# Altium PCB PCB.PcbDoc (part 1 of 2)
Units mm, origin at the board's own origin, x right, y up, seen from the top; angles counter-clockwise.
Board outline 53.34 x 28.45 mm, 2 copper layers (Top Layer, Bottom Layer), stack 1.671 mm thick; 30 components, 49 nets, 162 pads, 72 vias.
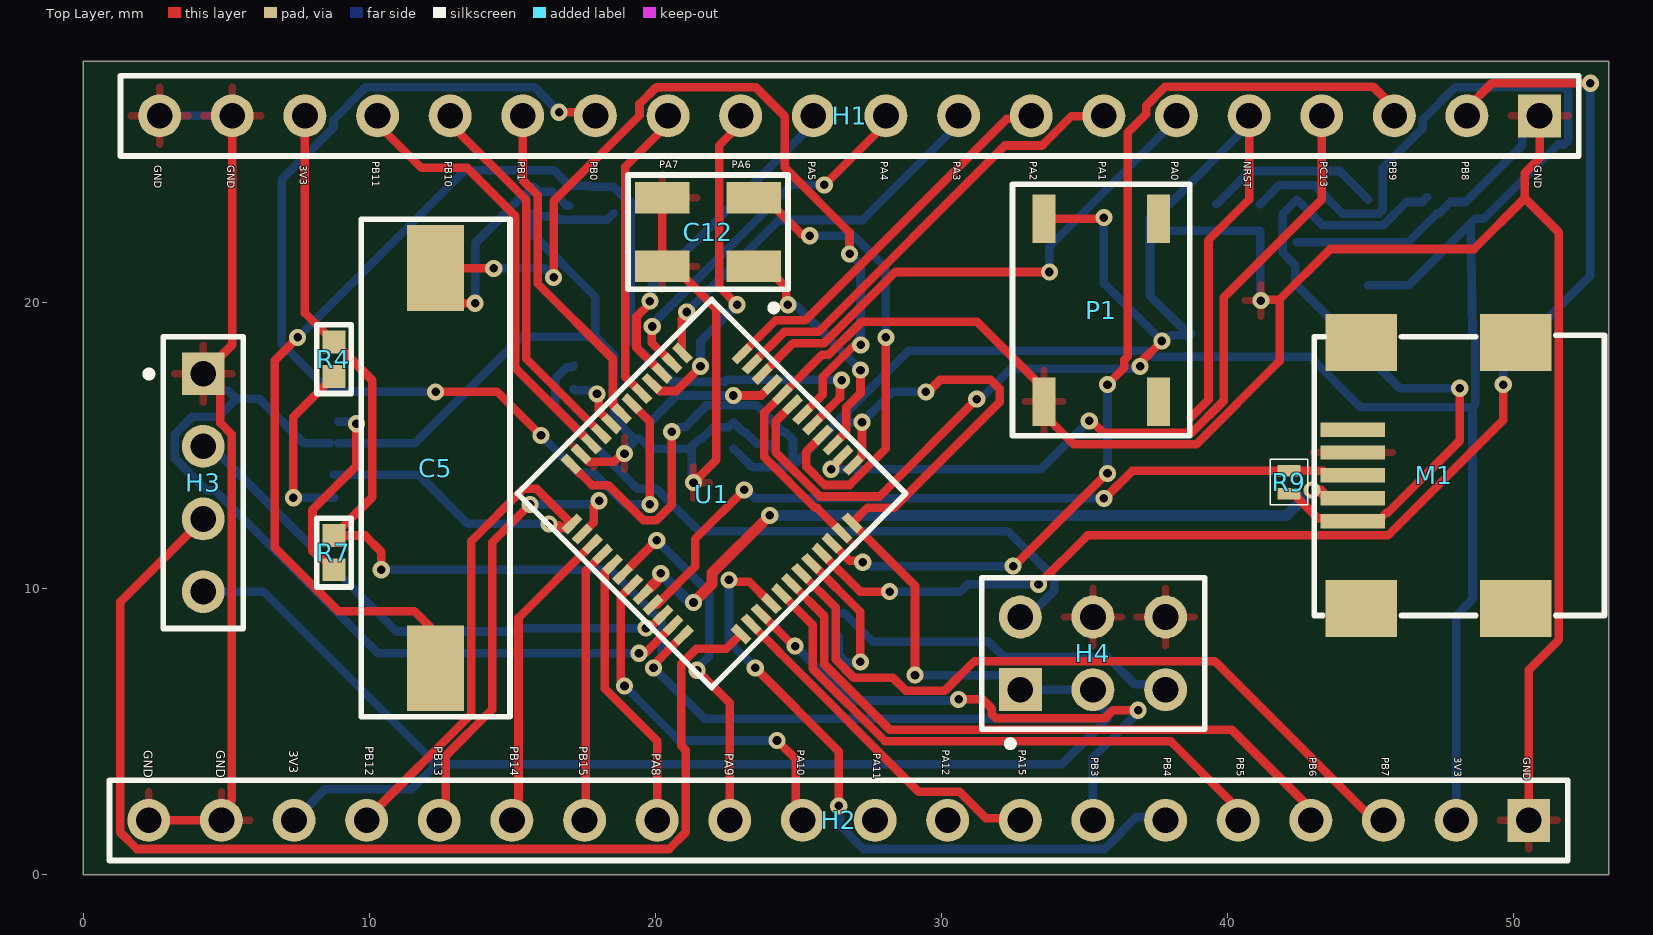
[diagram p0: Top Layer view]
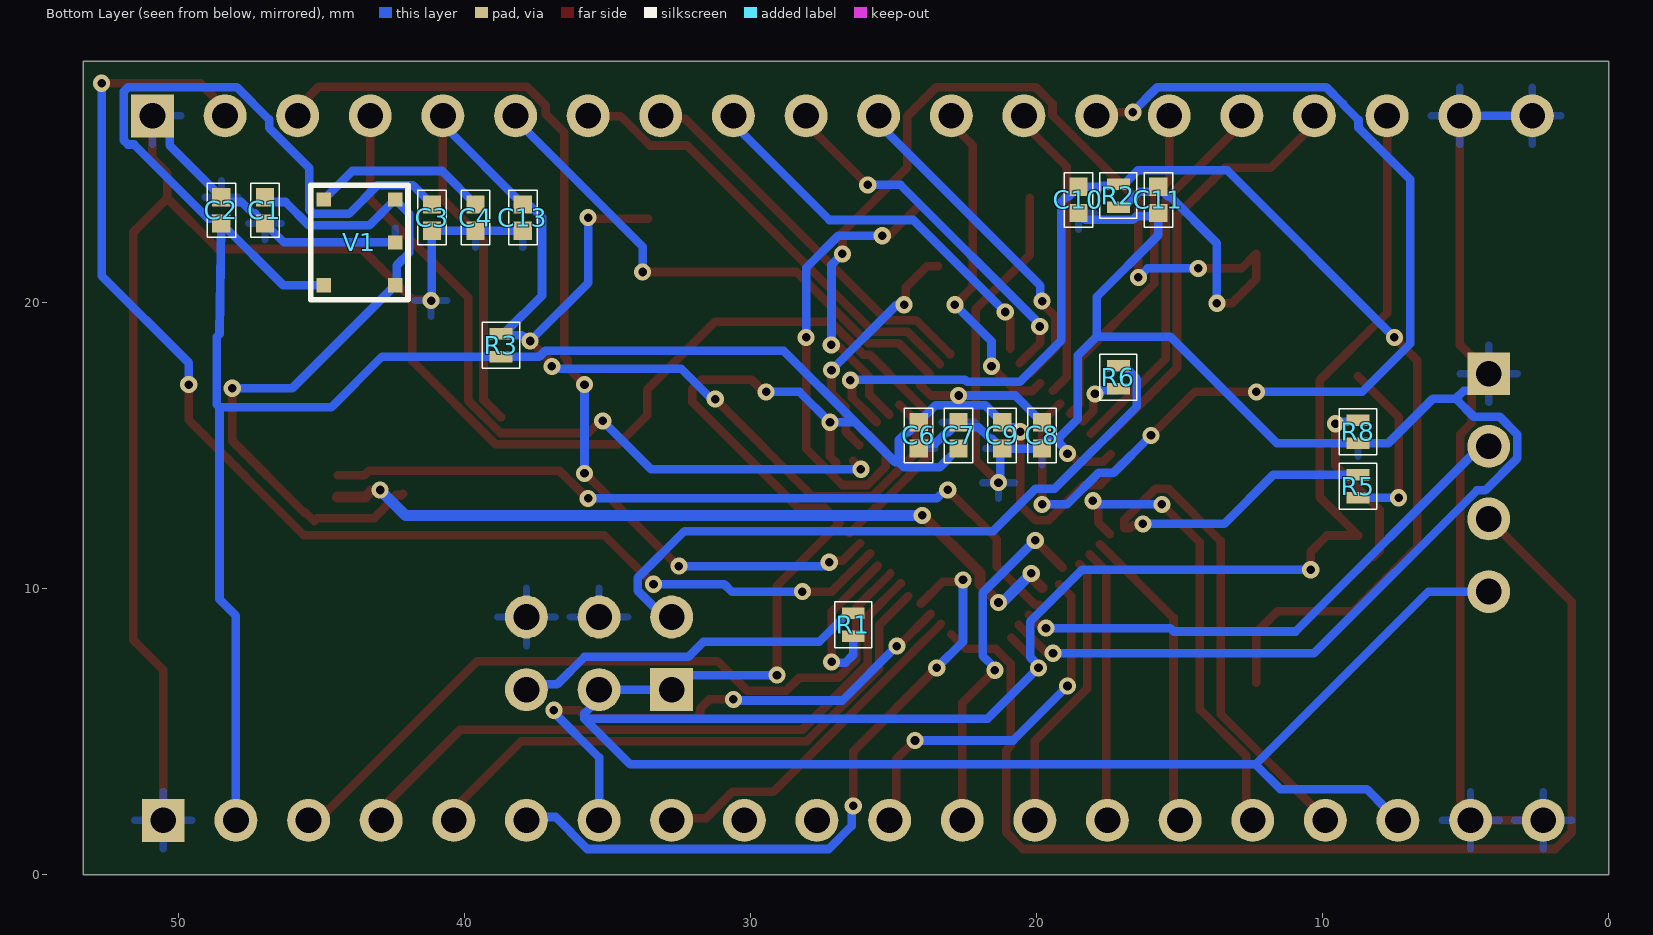
[diagram p1: Bottom Layer view, seen from below]
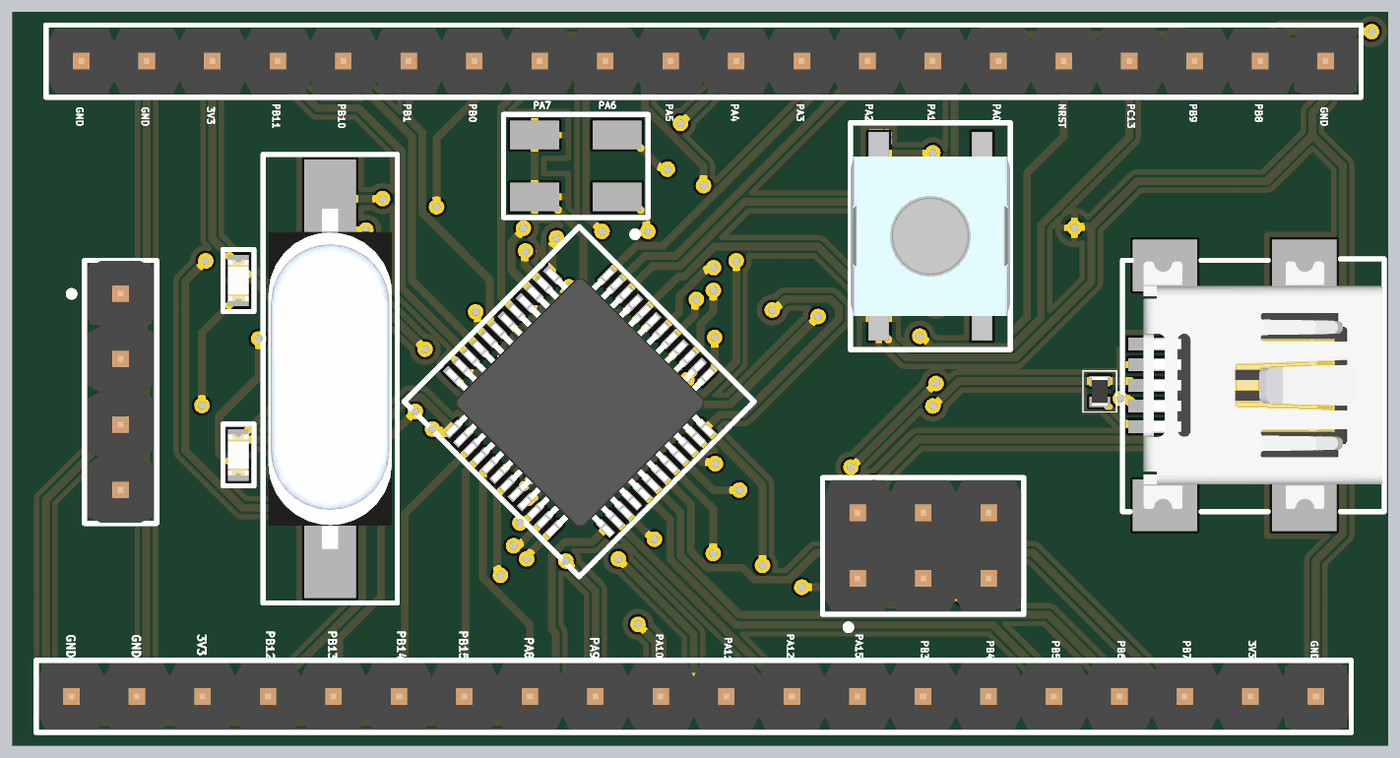
[diagram p2: 3D render of the assembled board from above, using the file's embedded part models]
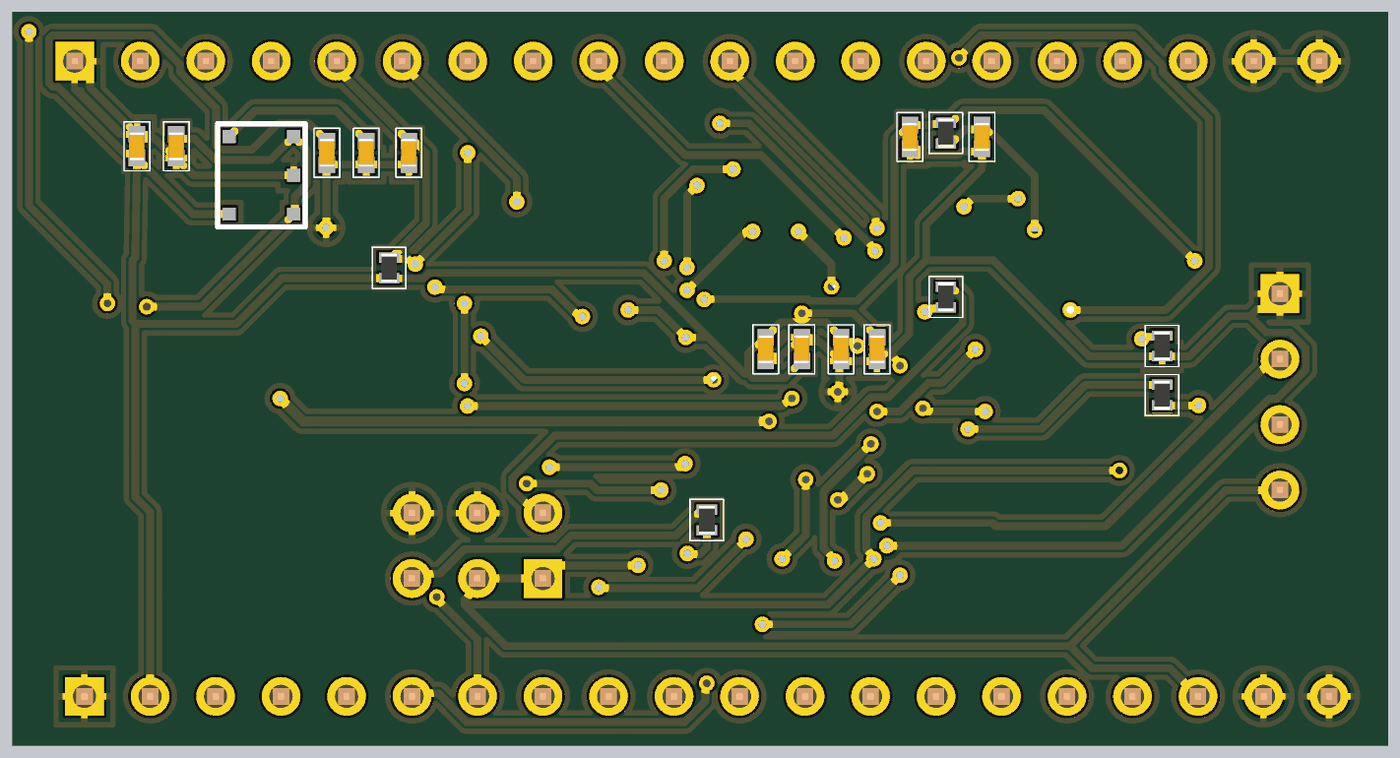
[diagram p3: 3D render of the assembled board from below, using the file's embedded part models]

## Layer stack, top to bottom
Top Solder: solder mask 0.0102, Solder Resist, Dk 3.5
Top Layer: signal copper 0.0356
Dielectric 1: dielectric 1.6, FR-4, Dk 4.8
Bottom Layer: signal copper 0.0356
Bottom Solder: solder mask 0.0102, Solder Resist, Dk 3.5

## Board outline
0,0 53.34,0 53.34,28.448 0,28.448

## Design rules (kind name [scope] priority, off if disabled: settings)
Clearance [All] p1: gap=0.1 ignorepadtopadclearanceinfootprint=TRUE
DiffPairsRouting [All] p1: maxlimit=0.254 minlimit=0.254 mostfreqgap=0.254 toplayer_minwidth=0.381 toplayer_maxwidth=0.381 toplayer_prefwidth=0.381 bottomlayer_minwidth=0.381 bottomlayer_maxwidth=0.381 bottomlayer_prefwidth=0.381 maxuncoupledlength=12.7
HoleSize [All] p1: absolutevalues=TRUE maxlimit=2.54 minlimit=0 maxpercent=80.000 minpercent=20.000
HoleToHoleClearance [All] p1: gap=0 allowstackedmicrovias=TRUE
MinimumSolderMaskSliver [All] p1: minsoldermaskwidth=0
PolygonConnect [All] p1: connectstyle=Relief reliefconductorwidth=0.254 reliefentries=4 polygonreliefangle="90 Angle" airgapwidth=0.254
RoutingVias [All] p1: holewidth=0.3 width=0.6 viastyle="Through Hole" minholewidth=0.3 minwidth=0.6 maxholewidth=0.3 maxwidth=0.6
SilkToSilkClearance [All] p1: silktosilkclearance=0
SilkToSolderMaskClearance [IsPad] p1: minsilkscreentomaskgap=0 clearancetoexposedcopper=TRUE
SolderMaskExpansion [All] p1: expansion=0.102 istentingtop=FALSE
Width [All] p1: maxlimit=1 minlimit=0.3 preferedwidth=0.3
24 further rules are at their usual default settings.

## Classes and differential pairs
differential pair class diff_90: D
differential pair D: +D_P -D_N

## Components (designator, comment, footprint, x,y, rotation, side; value= is the part's Value field where it differs from the comment)
C1 "0.1µF" CAPACITOR 46.99,23.241 r90 bottom
C2 "0.1µF" CAPACITOR 48.514,23.241 r270 bottom
C3 "1uF" CAPACITOR 41.148,22.987 r90 bottom
C4 "22pF" CAPACITOR 39.624,22.987 r90 bottom
C5 "8MHz" "CRYSTAL 8MHZ" 12.319,14.224 r90 top
C6 "0.1µF" CAPACITOR 24.13,15.367 r90 bottom
C7 "0.1µF" CAPACITOR 22.733,15.367 r270 bottom
C8 "0.1µF" CAPACITOR 19.812,15.367 r90 bottom
C9 "0.1µF" CAPACITOR 21.209,15.367 r90 bottom
C10 "22pF" CAPACITOR 18.542,23.604 r90 bottom
C11 "22pF" CAPACITOR 15.748,23.604 r90 bottom
C12 "32.768KHz" "CRYSTAL 32KHZ" 21.844,22.479 r90 top
C13 "0.1µF" CAPACITOR 37.973,22.987 r90 bottom
H1 "20x1 Header" "20 PIN HEADER" 26.797,26.543 r270 top
H2 "20x1 Header" "20 PIN HEADER" 26.416,1.905 r270 top
H3 "4x1 Header" "4 PIN HEADER" 4.191,13.716 r0 top
H4 "6x1 Header" "6 PIN HEADER" 35.306,7.747 r90 top
M1 "Mini USB" "MINI USB" 47.244,13.97 r180 top
P1 "Push Button" "PUSH BUTTON" 35.595,19.752 r90 top
R1 "10K Ohms" RESISTOR 26.416,8.744 r90 bottom
R2 "10M Ohms" RESISTOR 17.145,23.754 r270 bottom
R3 "10K Ohms" RESISTOR 38.735,18.523 r270 bottom
R4 "Red LED" LED 8.763,18.034 r90 top
R5 "1K Ohm" RESISTOR 8.763,13.589 r270 bottom
R6 "10K Ohms" RESISTOR 17.145,17.399 r270 bottom
R7 "Red LED" LED 8.763,11.268 r90 top
R8 "1K Ohm" RESISTOR 8.763,15.494 r90 bottom
R9 "10K Ohms" RESISTOR 42.164,13.735 r270 top
U1 "STM32F103C8T6" "MICRO CONTROLLER" 21.971,13.335 r225 top
V1 "Voltage Regulator" "VOLTAGE REGULATOR" 43.688,22.116 r90 bottom

## Footprints (in the part's own frame and the unit in brackets; to place one, negate y for a bottom-side part, rotate by r counter-clockwise, add the part's x,y. Pads: shape width x height; smd on the part's side, far side on the other; paste and mask are expansions set on the pad)
"4 PIN HEADER" [mm]
  rect 1.5x1.5 hole 0.9: 1(0,3.81)
  round 1.5 hole 0.9: 2(0,1.27) 3(0,-1.27) 4(0,-3.81)
  silkscreen extent -2,-5.1 1.4,5.1, body extent -1.27,-5.08 1.27,5.08, height 5.55
"6 PIN HEADER" [mm]
  rect 1.5x1.5 hole 0.9: 1(-1.27,2.54)
  round 1.5 hole 0.9: 2(-1.27,0) 3(-1.27,-2.54) 4(1.27,2.54) 5(1.27,0) 6(1.27,-2.54)
  silkscreen extent -3.26,-3.91 2.64,3.89, body extent -2.53,-3.82 2.55,3.8, height 5.55
"20 PIN HEADER" [mm]
  rect 1.5x1.5 hole 0.9: 1(0,24.13)
  round 1.5 hole 0.9: 2(0,21.59) 3(0,19.05) 4(0,16.51) 5(0,13.97) 6(0,11.43) 7(0,8.89) 8(0,6.35) 9(0,3.81) 10(0,1.27) 11(0,-1.27) 12(0,-3.81) 13(0,-6.35) 14(0,-8.89) 15(0,-11.43) 16(0,-13.97) 17(0,-16.51) 18(0,-19.05) 19(0,-21.59) 20(0,-24.13)
  silkscreen extent -1.4,-25.5 1.4,25.5, body extent -1.27,-25.4 1.27,25.4, height 5.55
CAPACITOR [mm]
  rect 0.64x0.64 smd: 1(-0.46,0) 2(0.46,0)
  silkscreen extent -0.95,-0.5 0.95,0.5, body extent -0.55,-0.3 0.55,0.3, height 0.88
"CRYSTAL 8MHZ" [mm]
  rect 3x2 smd: 1(-7,0) 2(7,0)
  silkscreen extent -8.7,-2.6 8.7,2.6, body extent -6.6,-2.4 6.6,2.4, height 4.31
"CRYSTAL 32KHZ" [mm]
  rect 1.1x1.9 smd: 1(-1.2,-1.6) 2(1.2,-1.6) 3(1.2,1.6) 4(-1.2,1.6)
  silkscreen extent -2.75,-2.8 2,2.8, body extent -2,-2.8 2,2.8, height 0.9
LED [mm]
  rect 0.8x0.8 smd: 1(-0.6,0) 2(0.6,0)
  silkscreen extent -1.2,-0.6 1.2,0.6, body extent -0.8,-0.4 0.8,0.4, height 0.54
"MICRO CONTROLLER" [mm] "CQFP, 48-Leads, Body 33.75x33.75mm, Pitch 0.64mm, IPC Medium Density"
  rect 0.75x0.3 smd: 1(-4.2,2.8) 2(-4.2,2.3) 3(-4.2,1.8) 4(-4.2,1.3) 5(-4.2,0.8) 6(-4.2,0.3) 7(-4.2,-0.2) 8(-4.2,-0.7) 9(-4.2,-1.2) 10(-4.2,-1.7) 11(-4.2,-2.2) 12(-4.2,-2.7) 25(4.2,-2.7) 26(4.2,-2.2) 27(4.2,-1.7) 28(4.2,-1.2) 29(4.2,-0.7) 30(4.2,-0.2) 31(4.2,0.3) 32(4.2,0.8) 33(4.2,1.3) 34(4.2,1.8) 35(4.2,2.3) 36(4.2,2.8)
  rect 0.3x0.75 smd: 13(-2.75,-4.2) 14(-2.25,-4.2) 15(-1.75,-4.2) 16(-1.25,-4.2) 17(-0.75,-4.2) 18(-0.25,-4.2) 19(0.25,-4.2) 20(0.75,-4.2) 21(1.25,-4.2) 22(1.75,-4.2) 23(2.25,-4.2) 24(2.75,-4.2) 37(2.75,4.2) 38(2.25,4.2) 39(1.75,4.2) 40(1.25,4.2) 41(0.75,4.2) 42(0.25,4.2) 43(-0.25,4.2) 44(-0.75,4.2) 45(-1.25,4.2) 46(-1.75,4.2) 47(-2.25,4.2) 48(-2.75,4.2)
  silkscreen extent -4.8,-4.8 4.8,4.8, body extent -4.5,-4.45 4.5,4.55, height 1.46
"MINI USB" [mm]
  rect 2.25x0.5 smd: 1(2.85,1.6) 2(2.85,0.8) 3(2.85,0) 4(2.85,-0.8) 5(2.85,-1.6)
  rect 2.5x2 smd: 6(2.55,4.65) 7(2.55,-4.65) 8(-2.85,-4.65) 9(-2.85,4.65)
  silkscreen extent -5.95,-4.9 4.2,4.9, body extent -5.87,-4.8 3.38,4.8, height 3.91
"PUSH BUTTON" [mm]
  rect 1.7x0.8 smd: 1(-3.2,2) 2(3.2,2) 3(-3.2,-2) 4(3.2,-2)
  silkscreen extent -4.4,-3.1 4.4,3.1, body extent -4,-3.1 4,3.1, height 3.1
RESISTOR [mm]
  rect 0.4x0.8 smd: 1(-0.4,0) 2(0.4,0)
  silkscreen extent -0.8,-0.65 0.8,0.65, body extent -0.55,-0.3 0.55,0.3, height 0.55
"VOLTAGE REGULATOR" [mm]
  rect 0.5x0.5 smd: 1(-1.5,-1.25) 2(0,-1.25) 3(1.5,-1.25) 4(1.5,1.25) 5(-1.5,1.25)
  silkscreen extent -2,-1.7 2,1.7, body extent -1.9,-1.6 1.9,1.6, height 0.81

## Part data
C1 C2 C6 C7 C8 C9 C13: library part C0805C104J5RACTU, "KEMET - C0805C104J5RACTU - SMD Multilayer Ceramic Capacitor, 0.1 µF, 50 V, 0805 [2012 Metric], ± 5%, X7R, C Series KEMET", Capacitance=100nF, Case/Package=0805, Case Code (Metric)=2012, Dielectric=X7R, Dielectric Material=Ceramic, Manufacturer=KEMET, Max Operating Temperature=125°C, Min Operating Temperature=-55°C, Package Quantity=1, Supplier Part Number 1=399-1171-1-ND, Tolerance=5%, Voltage=50V, Case Code (Imperial)=0805, ComponentLink1Description=https://datasheet.ciiva.com/7842/1732721-7842179.pdf?src-supplier=Element14, ComponentLink1URL=https://datasheet.ciiva.com/7842/1732721-7842179.pdf?src-supplier=Element14, ComponentLink2Description=https://datasheet.ciiva.com/14589/70095383-14589015.pdf?src-supplier=Allied+Electronics, ComponentLink2URL=https://datasheet.ciiva.com/14589/70095383-14589015.pdf?src-supplier=Allied+Electronics, ComponentLink3Description=https://datasheet.ciiva.com/5417/kem-c1002-x7r-smd-5417352.pdf?src-supplier=Mouser, ComponentLink3URL=https://datasheet.ciiva.com/5417/kem-c1002-x7r-smd-5417352.pdf?src-supplier=Mouser, ComponentLink4Description=https://datasheet.ciiva.com/39122/docfinderpartnumberc0402c102k5ractu-39122924.pdf?src-supplier=Onlinecomponents.com, ComponentLink4URL=https://datasheet.ciiva.com/39122/docfinderpartnumberc0402c102k5ractu-39122924.pdf?src-supplier=Onlinecomponents.com, ComponentLink5Description=https://datasheet.ciiva.com/7258/1828800-7258413.pdf?src-supplier=Newark, ComponentLink5URL=https://datasheet.ciiva.com/7258/1828800-7258413.pdf?src-supplier=Newark, ComponentLink6Description=https://datasheet.ciiva.com/28682/1851736-28682223.pdf?src-supplier=Element14, ComponentLink6URL=https://datasheet.ciiva.com/28682/1851736-28682223.pdf?src-supplier=Element14, Contact Plating=Tin,Matte, Depth=1.25mm, Height=0.9mm, Lead Pitch=0.75mm, Length=2mm, Manufacturer Part Number=C0805C104J5RACTU, Mount="Surface Mount,PCB", Number of Pins=2, Packaging="Tape and Reel", Pricing 1="1=0.19000, 10=0.13100, 100=0.06630, 500=0.04538, 1000=0.04015 (USD)", Radiation Hardening=No, REACH SVHC="No SVHC", RoHS=Yes, Stock 1=675679, Supplier 1=Digi-Key, Termination=SMD/SMT, Thickness=0.035inch, Voltage Rating=50V, Voltage Rating (DC)=50V, Width=0.049inch
C3: library part GCM21BR71H105KA03K, "Cap Ceramic 1uF 50V X7R 10% Pad SMD 0805 125C Automotive T/R", Case/Package=0805, Case Code (Metric)=2012, Dielectric=X7R, Manufacturer=Murata, Max Operating Temperature=125°C, Min Operating Temperature=-55°C, Package Quantity=10000, Ratings=AEC-Q200, Supplier Part Number 1=490-13310-1-ND, Tolerance=10%, Voltage Rating=50V, Capacitance=1uF, Case Code (Imperial)=0805, ComponentLink1Description=http://www.mouser.com/ds/2/281/c03e-806517.pdf?src-supplier=Mouser, ComponentLink1URL=http://www.mouser.com/ds/2/281/c03e-806517.pdf?src-supplier=Mouser, ComponentLink2Description=https://www.murata.com/~/media/webrenewal/support/library/catalog/products/capacitor/mlcc/c03e.ashx?la=en-us&src-supplier=Digi-Key, ComponentLink2URL=https://www.murata.com/~/media/webrenewal/support/library/catalog/products/capacitor/mlcc/c03e.ashx?la=en-us&src-supplier=Digi-Key, Height=1.25mm, Length=0.079inch, Manufacturer Part Number=GCM21BR71H105KA03K, Mount="Surface Mount", Packaging="Tape and Reel", Pricing 1="1=0.31000, 10=0.21600, 100=0.12970, 500=0.09726, 1000=0.08213, 2500=0.07781, 5000=0.07349 (USD)", RoHS=Yes, Stock 1=44921, Supplier 1=Digi-Key, Termination=SMD/SMT, Thickness=0.055inch, Voltage Rating (DC)=50V, Weight=0.000335oz, Width=1.25mm
C4 C10 C11: library part C0805C220J5GACTU, "Capacitor: ceramic; MLCC; 22pF; 50VDC; C0G; ±5%; SMD; 0805", Case/Package=0805, Case Code (Metric)=2012, Dielectric=C0G, Dielectric Material=Ceramic, Manufacturer=KEMET, Max Operating Temperature=125°C, Min Operating Temperature=-55°C, Package Quantity=1, Supplier Part Number 1=399-1113-1-ND, Temperature Coefficient=30ppm/°C, Tolerance=5%, Voltage=50V, Capacitance=22pF, Case Code (Imperial)=0805, ComponentLink1Description=https://datasheet.ciiva.com/7842/kem-c1003-c0g-smd-7842569.pdf?src-supplier=Element14, ComponentLink1URL=https://datasheet.ciiva.com/7842/kem-c1003-c0g-smd-7842569.pdf?src-supplier=Element14, ComponentLink2Description=https://datasheet.ciiva.com/28668/1789732-28668761.pdf?src-supplier=Element14, ComponentLink2URL=https://datasheet.ciiva.com/28668/1789732-28668761.pdf?src-supplier=Element14, ComponentLink3Description=https://datasheet.ciiva.com/7842/1372242-7842570.pdf?src-supplier=Element14, ComponentLink3URL=https://datasheet.ciiva.com/7842/1372242-7842570.pdf?src-supplier=Element14, Contact Material=Tin, Contact Plating=Tin,Matte, Depth=1.25mm, Height=0.78mm, Lead Free="Lead Free", Length=2mm, Manufacturer Part Number=C0805C220J5GACTU, Mount="PCB,Surface Mount", Packaging="Tape and Reel", Pricing 1="1=0.10000, 10=0.07000, 100=0.03100, 500=0.02214, 1000=0.01739 (USD)", Radiation Hardening=No, REACH SVHC="No SVHC", RoHS=Yes, Stock 1=658795, Supplier 1=Digi-Key, Termination=SMD/SMT, Thickness=0.035inch, Voltage Rating=50V, Voltage Rating (DC)=50V, Weight=0.000194oz, Width=1.25mm
C5: library part ECS-80-20-5PX-TR, "CRYSTAL 8.000 MHZ 20PF SMD", ESR (Equivalent Series Resistance)=60R, Frequency Stability=50ppm, Frequency Tolerance=30ppm, Load Capacitance=20pF, Manufacturer="ECS International", Max Operating Temperature=70°C, Min Operating Temperature=-10°C, Supplier Part Number 1=XC2076CT-ND, ComponentLink1Description=http://www.ecsxtal.com/store/pdf/partnumber4.pdf?src-supplier=Digi-Key, ComponentLink1URL=http://www.ecsxtal.com/store/pdf/partnumber4.pdf?src-supplier=Digi-Key, ComponentLink2Description=http://www.ecsxtal.com/store/pdf/csm-7x.pdf?src-supplier=Digi-Key, ComponentLink2URL=http://www.ecsxtal.com/store/pdf/csm-7x.pdf?src-supplier=Digi-Key, Frequency=8MHz, Height=0.169inch, Lead Free="Lead Free", Length=0.449inch, Manufacturer Part Number=ECS-80-20-5PX-TR, Mount="Surface Mount", Packaging="Tape and Reel", Pricing 1="1=0.30000, 10=0.24800, 50=0.22280, 100=0.19800, 500=0.18810 (USD)", RoHS=Yes, Stock 1=2393, Supplier 1=Digi-Key, Width=0.189inch
C12: library part ECS-.327-12.5-34B-C-TR, "Crystals 32.768KHz 12.5pF", Case/Package=SMD/SMT, ESR (Equivalent Series Resistance)=70kR, Frequency=32.768kHz, Frequency Stability=10ppm, Load Capacitance=12.5pF, Manufacturer="ECS International", Max Operating Temperature=85°C, Min Operating Temperature=-40°C, Package Quantity=3000, Supplier Part Number 1=XC1968CT-ND, ComponentLink1Description=http://www.mouser.com/ds/2/122/ecx-31b-1108368.pdf?src-supplier=Mouser, ComponentLink1URL=http://www.mouser.com/ds/2/122/ecx-31b-1108368.pdf?src-supplier=Mouser, ComponentLink2Description=http://www.ecsxtal.com/store/pdf/partnumber4.pdf?src-supplier=Digi-Key, ComponentLink2URL=http://www.ecsxtal.com/store/pdf/partnumber4.pdf?src-supplier=Digi-Key, Frequency Tolerance=10ppm, Height=0.035inch, Lead Free="Lead Free", Lead Pitch=2.4mm, Length=0.126inch, Manufacturer Part Number=ECS-.327-12.5-34B-C-TR, Mount="Surface Mount", Number of Pins=2, Packaging="Tape and Reel", Pricing 1="1=0.74000, 10=0.65800, 50=0.61500, 100=0.54340, 500=0.51480, 1000=0.42900 (USD)", RoHS=Yes, Stock 1=21159, Supplier 1=Digi-Key, Termination=SMD/SMT, Width=0.061inch
H1 H2: library part 61304011121, "CONN HEADER VERT 40POS 2.54MM", Color=Black, Manufacturer="Wurth Electronics", Supplier Part Number 1=732-5307-ND, ComponentLink1Description=http://www.farnell.com/cad/1737268.pdf?src-supplier=Element14, ComponentLink1URL=http://www.farnell.com/cad/1737268.pdf?src-supplier=Element14, ComponentLink2Description=https://katalog.we-online.de/em/datasheet/6130xx11121.pdf?src-supplier=Digi-Key, ComponentLink2URL=https://katalog.we-online.de/em/datasheet/6130xx11121.pdf?src-supplier=Digi-Key, Connector Type="Male Pin", Contact Material=Copper, Contact Mating Length=0.236inch, Contact Plating=Gold, Gender=Male, Manufacturer Part Number=61304011121, Mount="Through Hole", Number of Contacts=40, Number of Positions=40, Number of Rows=1, Packaging=Bulk, Pitch=0.1inch, REACH SVHC=Unknown, RoHS=Yes, Supplier 1=Digi-Key, Termination=Solder
H3: library part 22-23-2041, "Conn Wire to Board HDR 4 POS 2.54mm Solder ST Thru-Hole KK® Bag", Color=White, Contact Resistance=10mR, Current Rating=4A, Flammability Rating="UL94 V-0", Housing Color=Orange, Insulation Resistance=500GR, Manufacturer=Molex, Max Current Rating=7A, Max Operating Temperature=75°C, Max Voltage Rating (AC)=600V, Min Operating Temperature=-55°C, Package Quantity=2000, Supplier Part Number 1=WM4202-ND, Voltage Rating=250V, Approvals=UL,CSA, ComponentLink1Description=https://datasheet.ciiva.com/19462/1966245-19462162.pdf?src-supplier=Jameco, ComponentLink1URL=https://datasheet.ciiva.com/19462/1966245-19462162.pdf?src-supplier=Jameco, ComponentLink2Description=https://datasheet.ciiva.com/5151/0022232041-pcb-headers-227043-5151795.pdf?src-supplier=Mouser, ComponentLink2URL=https://datasheet.ciiva.com/5151/0022232041-pcb-headers-227043-5151795.pdf?src-supplier=Mouser, ComponentLink3Description=https://datasheet.ciiva.com/19454/232282-19454309.pdf?src-supplier=Jameco, ComponentLink3URL=https://datasheet.ciiva.com/19454/232282-19454309.pdf?src-supplier=Jameco, ComponentLink4Description=https://datasheet.ciiva.com/11747/0900766b80d8f4d1-11747883.pdf?src-supplier=RSComponents, ComponentLink4URL=https://datasheet.ciiva.com/11747/0900766b80d8f4d1-11747883.pdf?src-supplier=RSComponents, ComponentLink5Description=https://datasheet.ciiva.com/16725/0022232041-pcb-headers-16725643.pdf?src-supplier=Avnet+Europe, ComponentLink5URL=https://datasheet.ciiva.com/16725/0022232041-pcb-headers-16725643.pdf?src-supplier=Avnet+Europe, ComponentLink6Description=https://datasheet.ciiva.com/7106/1859840-7106278.pdf?src-supplier=Newark, ComponentLink6URL=https://datasheet.ciiva.com/7106/1859840-7106278.pdf?src-supplier=Newark, ComponentLink7Description=https://datasheet.ciiva.com/7843/1896518-7843901.pdf?src-supplier=Element14, ComponentLink7URL=https://datasheet.ciiva.com/7843/1896518-7843901.pdf?src-supplier=Element14, Contact Gender=Male, Contact Material="Brass,Copper Alloy,Tin", Contact Plating=Tin,Copper, Depth=9.02mm, Gender=Male, Glow Wire Compliant=Non-compliant, Halogen Free="Low Halogen", Height=18.42mm, Housing Material=Nylon, Lead Free="Lead Free", Length=19.81mm, Manufacturer Part Number=22-23-2041, Mount="Cable,Through Hole", Number of Circuits=4, Number of Contacts=4, Number of Lines=1, Number of Poles=4, Number of Positions=4, Number of Rows=1, Orientation=Straight, Packaging=Bulk, Pitch=2.54mm, Pricing 1="1=0.28000, 10=0.26700, 100=0.18720, 500=0.16044, 1000=0.13370, 5000=0.11460, 10000=0.10696 (USD)", Radiation Hardening=No, REACH SVHC=Unknown, RoHS=Yes, Stock 1=33520, Supplier 1=Digi-Key, Termination="Through Hole", Voltage Rating (DC)=250V
H4: library part 22-27-2061, "6 Way 2.54mm Kk Molex Straight Header", Color=Natural, Contact Resistance=10mR, Housing Color=White, Manufacturer=Molex, Max Operating Temperature=75°C, Min Operating Temperature=0°C, Supplier Part Number 1=WM4115-ND, ComponentLink1Description=https://datasheet.ciiva.com/716/022272051-sd-716503.pdf?src-supplier=Digi-Key, ComponentLink1URL=https://datasheet.ciiva.com/716/022272051-sd-716503.pdf?src-supplier=Digi-Key, ComponentLink2Description=https://datasheet.ciiva.com/11746/0900766b80462750-11746243.pdf?src-supplier=RSComponents, ComponentLink2URL=https://datasheet.ciiva.com/11746/0900766b80462750-11746243.pdf?src-supplier=RSComponents, ComponentLink3Description=https://datasheet.ciiva.com/15217/getdatasheetpartid-176662-15217687.pdf?src-supplier=Verical, ComponentLink3URL=https://datasheet.ciiva.com/15217/getdatasheetpartid-176662-15217687.pdf?src-supplier=Verical, ComponentLink4Description=https://datasheet.ciiva.com/16468/0022272061-pcb-headers-16468939.pdf?src-supplier=Avnet+Asia, ComponentLink4URL=https://datasheet.ciiva.com/16468/0022272061-pcb-headers-16468939.pdf?src-supplier=Avnet+Asia, ComponentLink5Description=https://datasheet.ciiva.com/20207/22-0838e-20207118.pdf?src-supplier=Rapid+Electronics, ComponentLink5URL=https://datasheet.ciiva.com/20207/22-0838e-20207118.pdf?src-supplier=Rapid+Electronics, Connector Type="Male Pin", Contact Material=Brass, Contact Mating Length=0.295inch, Contact Plating=Tin,Copper, Depth=5.8mm, Fastening Type=Friction, Gender=Male, Housing Material=Nylon, Length=15.24mm, Manufacturer Part Number=22-27-2061, Mount="Through Hole", Number of Contacts=6, Number of Positions=6, Number of Rows=1, Orientation=Straight, Packaging=Bulk, Pitch=2.54mm, Pricing 1="1=0.49000, 10=0.46000, 100=0.35240, 500=0.30640, 1000=0.25278, 5000=0.22214, 10000=0.20682 (USD)", RoHS=Yes, Stock 1=2007, Supplier 1=Digi-Key, Termination=Solder
M1: library part 0548191572, "Conn Mini USB Type B RCP 5 POS 0.8mm Solder RA SMD 5 Terminal 1 Port Embossed T/R", Manufacturer=Molex, Max Operating Temperature=85°C, Min Operating Temperature=-20°C, Package Quantity=4800, Supplier Part Number 1=WM6794CT-ND, ComponentLink1Description=https://datasheet.ciiva.com/3897/190710548191572-io-nectors-3897712.pdf?src-supplier=Arrow, ComponentLink1URL=https://datasheet.ciiva.com/3897/190710548191572-io-nectors-3897712.pdf?src-supplier=Arrow, Connector Type=USB, Contact Material="Copper Alloy", Contact Plating=Gold, Depth=9mm, Gender=Receptacle, Housing Material=Polyphthalamide, Length=9.9mm, Manufacturer Part Number=0548191572, Mount="Surface Mount,Horizontal", Number of Contacts=5, Number of Ports=1, Number of Terminals=5, Orientation="Right Angle", Packaging="Tape and Reel", Pitch=0.8mm, Pricing 1="1=2.51000, 10=2.27800, 25=2.13840, 50=2.04540, 100=1.95240, 250=1.76648, 500=1.62702, 1000=1.39458 (USD)", RoHS=Yes, Stock 1=2164, Supplier 1=Digi-Key, Termination=Solder
P1: library part G3B15AB-S-YA, "G3B Series SPDT On-Mom Upright Black Cap Surface Mount Pushbutton Switch", Flammability Rating="UL94 V-0", Manufacturer="NKK Switches", Max Current Rating=100mA, Max Operating Temperature=85°C, Max Voltage Rating (AC)=28V, Min Operating Temperature=-30°C, Package Quantity=50, Power Rating=400mW, Supplier Part Number 1=360-3894-ND, Actuator Material=Polyphenylene, Actuator Type="Round, Button", ComponentLink1Description=https://datasheet.ciiva.com/16467/g3pushbuttons-16467583.pdf?src-supplier=Future+Electronics, ComponentLink1URL=https://datasheet.ciiva.com/16467/g3pushbuttons-16467583.pdf?src-supplier=Future+Electronics, Contact Material=Bronze, Contact Plating=Gold, Depth=7.6mm, Electrical Life=50000Cycles, Housing Material=Polyphenylene, Lead Free="Lead Free", Length=11mm, Manufacturer Part Number=G3B15AB-S-YA, Max Voltage Rating (DC)=28V, Mechanical Life=50000Cycles, Mount="Surface Mount", Packaging=Rail/Tube, Pricing 1="1=6.90000, 10=6.20900, 25=5.89680, 50=5.64720, 100=5.46000, 250=5.17920, 500=4.74240, 1000=4.52400 (USD)", RoHS=Yes, Stock 1=32, Supplier 1=Digi-Key, Switch Function=On-Mom, Termination="Gull Wing", Throw Configuration=SPDT, Voltage Rating (AC)=28V, Voltage Rating (DC)=28V
R1 R3 R6 R9: library part PHT0603Y1002BGT, "RES SMD 10KOHM 0.1% 0.0375W 0603", Case/Package=0603, Case Code (Metric)=1608, Manufacturer="Vishay Sfernice", Max Operating Temperature=215°C, Min Operating Temperature=-55°C, Power Rating=12.5mW, Resistance=10kR, Supplier Part Number 1=PHTB-10KCT-ND, Temperature Coefficient=15ppm/°C, Tolerance=0.1%, Voltage Rating=75V, Case Code (Imperial)=0603, ComponentLink1Description=https://datasheet.ciiva.com/9052/pht-9052382.pdf?src-supplier=Avnet, ComponentLink1URL=https://datasheet.ciiva.com/9052/pht-9052382.pdf?src-supplier=Avnet, Composition="Thin Film", Height=0.5mm, Length=1.6mm, Manufacturer Part Number=PHT0603Y1002BGT, Number of Pins=2, Packaging="Tape and Reel", Pricing 1="1=11.30000, 10=10.59500, 100=7.53460 (USD)", Radiation Hardening=No, REACH SVHC="No SVHC", RoHS=Yes, Stock 1=173, Supplier 1=Digi-Key, Termination=SMD/SMT, Voltage Rating (DC)=75V, Width=0.8mm
R2: library part HVC0805T1005JET, "RES SMD 10M OHM 5% 1/8W 0805", Case/Package=0805, Case Code (Metric)=2012, Manufacturer=Ohmite, Max Operating Temperature=155°C, Max Power Dissipation=125mW, Min Operating Temperature=-55°C, Package Quantity=1, Resistance=10MR, Supplier Part Number 1=HVC0805T1005JETCT-ND, Temperature Coefficient=100ppm/°C, Tolerance=5%, Voltage Rating=200V, Case Code (Imperial)=0805, ComponentLink1Description=https://datasheet.ciiva.com/7763/hvc-7763831.pdf?src-supplier=Element14, ComponentLink1URL=https://datasheet.ciiva.com/7763/hvc-7763831.pdf?src-supplier=Element14, ComponentLink2Description=https://datasheet.ciiva.com/2517/res-hvc-2517979.pdf?src-supplier=Digi-Key, ComponentLink2URL=https://datasheet.ciiva.com/2517/res-hvc-2517979.pdf?src-supplier=Digi-Key, ComponentLink3Description=https://datasheet.ciiva.com/2517/res-hvc-2517980.pdf?src-supplier=Digi-Key, ComponentLink3URL=https://datasheet.ciiva.com/2517/res-hvc-2517980.pdf?src-supplier=Digi-Key, ComponentLink4Description=https://datasheet.ciiva.com/2517/res-hvc-2517981.pdf?src-supplier=Digi-Key, ComponentLink4URL=https://datasheet.ciiva.com/2517/res-hvc-2517981.pdf?src-supplier=Digi-Key, ComponentLink5Description=https://datasheet.ciiva.com/16770/70024806-16770190.pdf?src-supplier=Allied+Electronics, ComponentLink5URL=https://datasheet.ciiva.com/16770/70024806-16770190.pdf?src-supplier=Allied+Electronics, Composition="Thick Film", Depth=1.25mm, Height=0.022inch, Length=0.079inch, Manufacturer Part Number=HVC0805T1005JET, Number of Terminations=2, Packaging="Tape and Reel", Power Rating=125mW, Pricing 1="1=2.32000, 10=2.05700, 100=1.57080 (USD)", REACH SVHC=Unknown, RoHS=Yes, Stock 1=256, Supplier 1=Digi-Key, Termination=SMD/SMT, Voltage Rating (DC)=200V, Width=0.049inch
R4 R7: library part LHR974-LP-1, "LED RED DIFFUSED 0805 SMD", Forward Current=30mA, Forward Voltage=2.6V, Manufacturer="Osram Opto", Max Operating Temperature=85°C, Min Operating Temperature=-30°C, Reverse Voltage=5V, Supplier Part Number 1=SML-D12U1WT86CT-ND, Test Current=20mA, ComponentLink1Description=http://components.arrow.com/part/dataview/0323_01825492?src-supplier=Arrow+Europe, ComponentLink1URL=http://components.arrow.com/part/dataview/0323_01825492?src-supplier=Arrow+Europe, ComponentLink2Description=http://www.jameco.com/Jameco/Products/ProdDS/2085634.pdf?src-supplier=Jameco, ComponentLink2URL=http://www.jameco.com/Jameco/Products/ProdDS/2085634.pdf?src-supplier=Jameco, ComponentLink3Description=http://www.mouser.com/ds/2/311/LH%20R974%20-%20CHIPLED%200805-318659.pdf?src-supplier=Mouser, ComponentLink3URL=http://www.mouser.com/ds/2/311/LH%20R974%20-%20CHIPLED%200805-318659.pdf?src-supplier=Mouser, ComponentLink4Description=https://dammedia.osram.info/media/resource/hires/osram-dam-2493888/LH%20R974.pdf?src-supplier=Digi-Key, ComponentLink4URL=https://dammedia.osram.info/media/resource/hires/osram-dam-2493888/LH%20R974.pdf?src-supplier=Digi-Key, ComponentLink5Description=https://www.verical.com/server-webapp/html/getDatasheet?partID=258950&src-supplier=Verical, ComponentLink5URL=https://www.verical.com/server-webapp/html/getDatasheet?partID=258950&src-supplier=Verical, ComponentLink6Description=http://components.arrow.com/part/dataview/41971690S1077610N9133?src-supplier=Arrow, ComponentLink6URL=http://components.arrow.com/part/dataview/41971690S1077610N9133?src-supplier=Arrow, ComponentLink7Description=http://components.arrow.com/part/dataview/41971690S6190115N2128?src-supplier=Arrow, ComponentLink7URL=http://components.arrow.com/part/dataview/41971690S6190115N2128?src-supplier=Arrow, Depth=1.35mm, Dominant Wavelength=645nm, Length=2.1mm, Lens Style=Diffused,Colorless, Luminous Intensity=15mcd, Manufacturer Part Number=LHR974-LP-1, Mount="Surface Mount", Number of Elements=1, Number of Pins=2, Packaging="Tape and Reel", Radiation Hardening=No, RoHS=Yes, Supplier 1=Digi-Key, Viewing Angle=160°
R5 R8: library part CRGP2512F1K0, "TE CONNECTIVITY - CRGP2512F1K0 - SMD Chip Resistor, 2512 [6432 Metric], 1 kohm, CRGP Series, 500 V, Thick Film, 2 W", Case/Package=2512, Manufacturer="TE Connectivity", Max Operating Temperature=155°C, Max Power Dissipation=2W, Min Operating Temperature=-55°C, Resistance=1kR, Supplier Part Number 1=A130721CT-ND, Temperature Coefficient=100ppm/°C, Tolerance=1%, ComponentLink1Description=https://4donline.ihs.com/images/VipMasterIC/IC/TYEL/TYEL-S-A0005460475/TYEL-S-A0005460475-1.pdf?hkey=52A5661711E402568146F3353EA87419&src-supplier=Farnell, ComponentLink1URL=https://4donline.ihs.com/images/VipMasterIC/IC/TYEL/TYEL-S-A0005460475/TYEL-S-A0005460475-1.pdf?hkey=52A5661711E402568146F3353EA87419&src-supplier=Farnell, ComponentLink2Description=https://www.te.com/commerce/DocumentDelivery/DDEController?Action=srchrtrv&amp;DocNm=9-1773463-9&amp;DocType=DS&amp;DocLang=English&src-supplier=Digi-Key, ComponentLink2URL=https://www.te.com/commerce/DocumentDelivery/DDEController?Action=srchrtrv&amp;DocNm=9-1773463-9&amp;DocType=DS&amp;DocLang=English&src-supplier=Digi-Key, ComponentLink3Description=https://4donline.ihs.com/images/VipMasterIC/IC/TYEL/TYEL-S-A0005460475/TYEL-S-A0005460475-1.pdf?hkey=52A5661711E402568146F3353EA87419&src-supplier=Newark, ComponentLink3URL=https://4donline.ihs.com/images/VipMasterIC/IC/TYEL/TYEL-S-A0005460475/TYEL-S-A0005460475-1.pdf?hkey=52A5661711E402568146F3353EA87419&src-supplier=Newark, ComponentLink4Description=https://4donline.ihs.com/images/VipMasterIC/IC/TYEL/TYEL-S-A0005460475/TYEL-S-A0005460475-1.pdf?hkey=52A5661711E402568146F3353EA87419&src-supplier=Element14, ComponentLink4URL=https://4donline.ihs.com/images/VipMasterIC/IC/TYEL/TYEL-S-A0005460475/TYEL-S-A0005460475-1.pdf?hkey=52A5661711E402568146F3353EA87419&src-supplier=Element14, ComponentLink5Description=https://www.te.com/commerce/DocumentDelivery/DDEController?Action=srchrtrv&DocNm=9-1773463-9&DocType=DS&DocLang=English&src-supplier=Digi-Key, ComponentLink5URL=https://www.te.com/commerce/DocumentDelivery/DDEController?Action=srchrtrv&DocNm=9-1773463-9&DocType=DS&DocLang=English&src-supplier=Digi-Key, Composition="Thick Film", Manufacturer Part Number=CRGP2512F1K0, Number of Terminations=2, Packaging="Tape and Reel", Pricing 1="1=0.50000, 10=0.35500, 100=0.18470, 1000=0.09947 (USD)", RoHS=No, Stock 1=10481, Supplier 1=Digi-Key
U1: "STMICROELECTRONICS - STM32F103C8T6 - ARM MCU, Motor Control, STM32 Family STM32F1 Series Microcontrollers, ARM Cortex-M3, 32bit, 72 MHz", Case/Package=LQFP, Frequency=72MHz, Manufacturer=STMicroelectronics, Max Operating Temperature=85°C, Max Power Dissipation=363mW, Max Supply Voltage=3.6V, Min Operating Temperature=-40°C, Min Supply Voltage=2V, Package Quantity=250, Supplier Part Number 1=497-6063-ND, Address Bus Width=32b, ComponentLink1Description=https://datasheet.ciiva.com/15122/getdatasheetpartid-69880-15122076.pdf?src-supplier=Verical, ComponentLink1URL=https://datasheet.ciiva.com/15122/getdatasheetpartid-69880-15122076.pdf?src-supplier=Verical, ComponentLink2Description=https://datasheet.ciiva.com/26816/stm32f103c8t6-26816902.pdf?src-supplier=IIIC, ComponentLink2URL=https://datasheet.ciiva.com/26816/stm32f103c8t6-26816902.pdf?src-supplier=IIIC, ComponentLink3Description=https://datasheet.ciiva.com/16210/cd00161566-16210248.pdf?src-supplier=Future+Electronics, ComponentLink3URL=https://datasheet.ciiva.com/16210/cd00161566-16210248.pdf?src-supplier=Future+Electronics, ComponentLink4Description=https://datasheet.ciiva.com/14100/pustm-arm-microcont-stm32f103-en-14100508.pdf?src-supplier=Distrelec, ComponentLink4URL=https://datasheet.ciiva.com/14100/pustm-arm-microcont-stm32f103-en-14100508.pdf?src-supplier=Distrelec, ComponentLink5Description=https://datasheet.ciiva.com/8054/1730126-8054942.pdf?src-supplier=Element14, ComponentLink5URL=https://datasheet.ciiva.com/8054/1730126-8054942.pdf?src-supplier=Element14, ComponentLink6Description=https://datasheet.ciiva.com/48687/001075658-da-01-en-mcu-64kb-mem-stm32f103c8t6-lqfp-48-stm-48687589.pdf?src-supplier=Conrad, ComponentLink6URL=https://datasheet.ciiva.com/48687/001075658-da-01-en-mcu-64kb-mem-stm32f103c8t6-lqfp-48-stm-48687589.pdf?src-supplier=Conrad, Core Architecture=ARM, Data Bus Width=32b, Density=64KB, Height=1.45mm, Interface=I2C,SPI,USB,CAN,IrDA,UART,USART,LIN, Lead Free="Lead Free", Length=7mm, Manufacturer Part Number=STM32F103C8T6, Max Frequency=72MHz, Memory Size=64KB, Memory Type=FLASH, Number of ADC Channels=10, Number of Bits=32, Number of I2C Channels=2, Number of I/Os=37, Number of Pins=48, Number of Programmable I/O=48, Number of PWM Channels=1, Number of SPI Channels=2, Number of Timers/Counters=4, Oscillator Type=Internal, Packaging=Tray, Peripherals="POR,PWM,WDT,DMA,Temp Sensor,I2C", Pricing 1="1=4.94000, 10=4.43700, 25=4.19480, 100=3.63540, 250=3.44896, 500=3.09474, 1000=2.61002, 2500=2.47952, 5000=2.38630 (USD)", Radiation Hardening=No, RAM Size=20KB, REACH SVHC="No SVHC", RoHS=Yes, Stock 1=1173, Supplier 1=Digi-Key, Termination=SMD/SMT, Watchdog Timer=Yes, Width=7.2mm
V1: library part RT9193-33GB, "IC REG LINEAR 3.3V 300MA SOT23-5", Case/Package=SOT-23-5, Dropout Voltage=220mV, Manufacturer=Richtek, Max Input Voltage=5.5V, Max Operating Temperature=125°C, Min Current Limit=360mA, Min Input Voltage=2.5V, Min Operating Temperature=-40°C, Nominal Output Voltage=3.3V, Output Current=300mA, Supplier Part Number 1=1028-1014-1-ND, ComponentLink1Description=https://datasheet.ciiva.com/28652/1782157-28652989.pdf?src-supplier=Element14, ComponentLink1URL=https://datasheet.ciiva.com/28652/1782157-28652989.pdf?src-supplier=Element14, ComponentLink2Description=https://datasheet.ciiva.com/2046/3d3futf-83fb3frfm5mtkzlte2lnbkzg3d3d3f3d-2046896.pdf?src-supplier=Digi-Key, ComponentLink2URL=https://datasheet.ciiva.com/2046/3d3futf-83fb3frfm5mtkzlte2lnbkzg3d3d3f3d-2046896.pdf?src-supplier=Digi-Key, Lead Free="Lead Free", Manufacturer Part Number=RT9193-33GB, Mount="Surface Mount", Number of Pins=5, Number of Regulators=1, Output Voltage=3.3V, Packaging="Tape and Reel", Pricing 1="1=0.50000, 10=0.43100, 25=0.40240, 100=0.29900, 250=0.25300, 500=0.24150, 1000=0.17825 (USD)", REACH SVHC=Unknown, RoHS=Yes, Stock 1=11176, Supplier 1=Digi-Key

## Via types
v1: diameter 0.6, hole 0.3, Top Layer to Bottom Layer, 72 vias

## Nets (pads, with @x,y where several pads share a name; then routed paths per layer and width w, separated by ;. In a path a pad name is that pad's centre, name@x,y a point inside that pad or via, vN(x,y) a via of type N, cw(c..) or ccw(c..) an arc to the next point about the centre after c; other vN are vias at no path point)
+3V3: C2.2 C3.2 C6.2 C7.2 C8.2 C9.2 H1.18 H2.2 H2.18 H3.4 H4.1 H4.2 R3.2 R4.2 R7.2 U1.1 U1.9 U1.24 U1.36 U1.48 V1.5 | length 212
  Top Layer w0.3: H1.18 7.747,19.65 10.1,17.297 10.1,13.205 R7.2 9.849,11.868 10.414,11.303 v1(10.414,10.668) ; U1.24 17.786,13.631 18.357,13.631 19.584,12.404 20.04,12.404 20.574,12.938 v1(20.574,15.494) ; v1(19.939,7.239) 19.939,7.343 U1.36@20.893,8.297 ; v1(22.733,16.764) 23.703,16.764 U1.9 ; U1.1@27.009,14.413 27.229,14.633 v1(27.229,15.827) ; v1(29.083,6.985) 29.083,10.112 27.044,12.151 U1.48 27.408,12.833 28.342,12.833 32.046,16.536 32.046,16.992 31.724,17.314 29.968,17.314 29.545,16.891 v1(29.464,16.891)
  Bottom Layer w0.3: H3.4 6.299,9.906 12.344,3.861 ; H2.18@7.366,2.312 7.381,2.297 7.758,2.297 8.459,2.998 11.481,2.998 12.344,3.861 ; v1(10.414,10.668) 18.415,10.668 20.225,8.858 20.225,7.607 19.939,7.32 v1(19.939,7.239) 21.717,5.461 35.814,5.461 ; C8.2@19.812,15.748 C8.2 20.749,16.764 v1(22.733,16.764) 22.733,16.421 ; v1(20.574,15.494) 20.655,15.494 20.818,15.657 21.039,15.657 C9.2 21.803,16.421 22.733,16.421 ; C7.2 23.389,14.251 24.64,14.251 24.816,14.427 ; v1(29.083,6.985) 32.166,6.985 32.486,6.665 32.486,6.477 H4.2 35.306,6.152 35.814,5.644 35.814,5.461 ; v1(29.464,16.891) 28.293,16.891 v1(27.229,15.827) 26.35,15.827 ; C3.2 41.817,24.116 43.054,24.116 44.054,23.116 45.292,23.116 45.438,23.262 45.438,24.72 46.847,26.129 46.847,26.417 47.973,27.543 51.781,27.543 51.927,27.397 51.927,25.689 51.781,25.543 51.571,25.543 48.979,22.951 48.684,22.951 C2.2 ; V1.5 46.349,20.616 C2.2 ; H2.2@48.006,2.032 48.006,9.065 48.58,9.638 48.58,16.346 ; 12.344,3.861 34.214,3.861 35.814,5.461 ; 22.733,16.421 23.536,16.421 C6.2 24.48,15.477 24.554,15.477 24.816,15.215 24.816,14.427 ; 24.816,14.427 24.95,14.427 26.35,15.827 ; 26.35,15.827 28.853,18.33 37.185,18.33 37.396,18.119 38.731,18.119 R3.2 42.894,18.123 44.671,16.346 48.58,16.346 ; C2.2 48.58,18.913 48.683,18.809 48.683,16.449 48.58,16.346
+5V: C1.2 M1.1 R9.2 V1.1 V1.3 | length 25.3
  Top Layer w0.3: R9.2 42.214,13.285 42.414,13.285 42.414,13.232 43.176,12.47 45.174,12.47 45.272,12.373 45.569,12.67 45.623,12.67 48.133,15.18 v1(48.133,17.018)
  Bottom Layer w0.3: C1.2 46.82,23.531 46.272,23.531 45.457,22.716 43.338,22.716 V1.3 41.938,23.116 41.938,21.762 42.384,21.316 42.384,20.67 46.036,17.018 v1(48.133,17.018)
BOOT0: H4.3 R1.2 | length 11.8
  Bottom Layer w0.3: R1.2 26.616,9.144 27.613,8.147 31.662,8.147 32.189,7.62 35.814,7.62 36.771,6.663 H4.3@37.159,6.663
BOOT1: H4.4 R6.1 | length 23.4
  Bottom Layer w0.3: R6.1 17.095,17.749 16.895,17.749 16.495,17.349 16.495,16.382 19.373,13.504 20.04,13.504 21.521,12.023 32.316,12.023 33.951,10.388 33.951,9.932 33.147,9.128 H4.4@33.147,9.017
D_N: M1.2 U1.32 | length 27
  Top Layer w0.381: U1.32@19.812,10.04 20.04,10.268 ; v1(21.336,9.525) 21.989,10.178 21.989,10.559 v1(24.003,12.573) ; v1(42.964,13.459) 43.006,13.417 43.272,13.417 43.481,13.208 M1.2@44.45,13.208
  Bottom Layer w0.381: v1(20.193,10.541) 21.167,9.567 21.294,9.567 v1(21.336,9.525) ; v1(24.003,12.573) 42.078,12.573 v1(42.964,13.459)
D_P: M1.3 R9.1 U1.33 | length 27.4
  Top Layer w0.3: U1.33 20.058,9.446 21.394,10.782 21.394,11.742 v1(23.114,13.462) ; v1(35.691,13.167) 35.719,13.167 36.687,14.135 42.694,14.135 42.698,14.139 43.154,14.139 43.158,14.135 43.354,14.135 43.519,13.97 M1.3@44.45,13.97
  Bottom Layer w0.3: v1(23.114,13.462) 23.195,13.462 23.49,13.167 v1(35.691,13.167)
GND: C1.1 C2.1 C3.1 C4.1 C6.1 C7.1 C8.1 C9.1 C10.1 C11.1 C12.3 C12.4 C13.1 H1.1 H1.19 H1.20 H2.1 H2.19 H2.20 H3.1 H4.5 H4.6 M1.4 P1.1 R8.1 U1.8 U1.23 U1.35 U1.47 V1.2 | length 186.5
  Top Layer w0.3: H2.20 H2.19 ; H3.1 5.207,18.542 H1.19@5.207,26.556 ; H3.1@4.331,17.526 4.791,17.066 4.791,15.8 5.191,15.4 5.191,2.595 4.826,2.23 H2.19@4.826,2.032 ; U1.23 17.678,14.446 18.556,14.446 18.842,14.732 v1(18.923,14.732) ; v1(19.431,7.747) 19.636,7.747 U1.35 ; C12.3 20.244,21.679 22.131,19.792 22.131,14.511 v1(21.336,13.716) ; U1.47 25.655,12.833 25.591,12.833 23.816,14.607 23.816,16.17 U1.8 25.835,18.189 26.063,18.189 27.22,19.346 31.251,19.346 33.615,16.982 33.615,16.082 34.645,15.052 38.916,15.052 41.834,17.969 41.834,20.117 ; v1(41.181,20.083) 41.215,20.117 41.834,20.117 ; H2.1 50.546,7.168 51.594,8.216 51.594,22.472 50.406,23.66 ; H1.1 50.927,25.062 50.406,24.541 50.406,23.66 ; 41.834,20.117 43.605,21.888 48.635,21.888 50.406,23.66
  Bottom Layer w0.3: H1.20 H1.19 ; H3.1 4.791,16.926 5.071,16.926 5.347,16.65 6.152,16.65 7.708,15.094 R8.1@8.613,15.094 ; 5.334,16.637 4.716,16.019 3.809,16.019 3.191,15.4 3.191,14.572 4.317,13.446 4.605,13.446 10.304,7.747 v1(19.431,7.747) ; R8.1@8.913,15.094 11.596,15.094 15.324,18.821 17.907,18.821 ; C10.1 18.302,22.904 16.641,22.904 16.518,23.027 15.865,23.027 C11.1 15.748,22.368 17.907,20.209 17.907,18.821 ; v1(18.923,14.732) 18.923,14.813 19.221,15.111 19.221,15.284 ; C9.1 C8.1 19.462,15.257 19.247,15.257 19.221,15.284 ; v1(21.336,13.716) 21.279,13.773 21.279,14.977 21.559,15.257 21.633,15.257 22.033,15.657 22.563,15.657 C7.1 23.083,15.477 23.157,15.477 23.557,15.077 23.96,15.077 C6.1 ; C13.1 C3.1 41.165,22.51 41.165,20.1 v1(41.181,20.083) ; V1.2 46.325,22.116 47.34,23.131 47.414,23.131 47.814,23.531 48.344,23.531 50.327,25.514 50.327,25.943 H1.1 ; 17.907,18.821 18.564,18.165 18.564,15.94 19.221,15.284
NetC4_2: C4.2 V1.4 | length 6.2
  Bottom Layer w0.3: C4.2 40.793,24.616 43.938,24.616 V1.4
NetR1_1: R1.1 U1.44 | length 5.6
  Top Layer w0.3: U1.44@25.56,10.807 27.172,9.194 v1(27.172,7.445)
  Bottom Layer w0.3: R1.1 26.416,7.694 26.687,7.423 27.15,7.423 v1(27.172,7.445)
NetR4_1: R4.1 R5.2 | length 6.2
  Top Layer w0.3: v1(7.346,13.189) 7.346,16.017 R4.1
  Bottom Layer w0.3: v1(7.346,13.189) R5.2
NetR6_2: R6.2 U1.20 | length 2
  Top Layer w0.3: v1(17.962,16.82) 18.02,16.762 18.02,16.226 U1.20@18.382,15.863
  Bottom Layer w0.3: R6.2 17.195,16.949 17.752,16.949 17.881,16.82 v1(17.962,16.82)
NetR7_1: R7.1 R8.2 | length 6.8
  Top Layer w0.3: R7.1 8.313,11.118 8.218,11.118 8.013,11.323 8.013,12.766 9.55,14.303 v1(9.55,15.773)
  Bottom Layer w0.3: R8.2@8.913,15.844 9.453,15.844 9.523,15.773 v1(9.55,15.773)
NRST: C13.2 H1.5 P1.2 R3.1 U1.7 | length 47.8
  Top Layer w0.3: U1.7 24.216,15.863 24.216,14.773 25.756,13.233 27.838,13.233 v1(31.242,16.637) ; P1.2 35.652,22.952 v1(35.687,22.987) ; v1(36.957,17.78) 36.957,17.907 v1(37.719,18.669) ; 38.735,16.002 39.347,16.614 39.347,22.197 40.767,23.617 H1.5
  Bottom Layer w0.3: v1(31.242,16.637) 31.369,16.637 32.427,17.695 36.872,17.695 v1(36.957,17.78) ; v1(35.687,22.987) 35.687,20.701 v1(37.719,18.669) 37.8,18.669 38.004,18.873 38.685,18.873 R3.1 ; R3.1@38.585,18.973 37.303,20.255 37.303,22.992 37.688,23.377 37.903,23.377 40.767,26.241 H1.5
PA0: H1.6 U1.10 | length 18.8
  Top Layer w0.3: U1.10 24.821,18.589 25.897,18.589 28.39,21.082 v1(33.782,21.082)
  Bottom Layer w0.3: v1(33.782,21.082) 33.782,21.971 38.227,26.416 H1.6
PA1: H1.7 U1.11 | length 15.9
  Top Layer w0.3: U1.11 24.514,18.989 25.704,18.989 32.223,25.508 33.509,25.508 33.544,25.543 33.561,25.543 34.553,26.535 35.679,26.535 H1.7
PA2: H1.8 U1.12 | length 13.6
  Top Layer w0.3: U1.12 24.207,19.389 25.247,19.389 32.295,26.437 33.041,26.437 H1.8
PA3: H1.9 U1.13 | length 13.9
  Top Layer w0.3: U1.13@20.928,18.408 20.928,19.434 21.098,19.604 v1(21.098,19.685)
  Bottom Layer w0.3: v1(21.098,19.685) 24.315,22.902 27.246,22.902 30.607,26.263 H1.9
PA4: H1.10 U1.14 | length 13
  Top Layer w0.3: v1(19.894,19.177) 19.894,19.144 19.869,19.12 19.869,18.619 U1.14 ; v1(25.908,24.13) 25.921,24.13 28.067,26.276 H1.10
  Bottom Layer w0.3: v1(19.894,19.177) 19.894,19.259 24.765,24.13 v1(25.908,24.13)
PA5: H1.11 U1.15 | length 11.9
  Top Layer w0.3: v1(19.812,20.066) 19.812,19.985 19.344,19.517 19.344,18.437 U1.15
  Bottom Layer w0.3: v1(19.812,20.066) 19.869,20.123 19.869,20.605 25.527,26.263 H1.11
PA6: H1.12 U1.16 | length 12
  Top Layer w0.3: U1.16 20.153,16.921 20.731,16.921 21.581,17.771 v1(21.581,17.789) ; v1(22.86,19.939) 22.244,20.555 22.244,25.52 22.987,26.263 H1.12
  Bottom Layer w0.3: v1(21.581,17.789) 21.581,18.66 v1(22.86,19.939)
PA7: H1.13 U1.17 | length 10.4
  Top Layer w0.3: U1.17@19.443,16.924 18.944,17.423 18.944,24.76 20.447,26.263 H1.13
PA8: H2.13 U1.29 | length 9.8
  Top Layer w0.3: U1.29 18.239,10.592 18.239,6.511 20.066,4.683 H2.13
PA9: H2.12 U1.30 | length 12.4
  Top Layer w0.3: U1.30@19.09,10.736 v1(20.052,11.698) ; v1(21.463,7.154) 22.606,6.011 H2.12@22.606,2.032
  Bottom Layer w0.3: v1(20.052,11.698) 21.886,9.864 21.886,7.658 21.463,7.235 v1(21.463,7.154)
PA10: H2.11 U1.31 | length 12.9
  Top Layer w0.3: v1(18.923,6.604) 18.923,6.685 18.796,6.812 18.796,9.736 U1.31 ; v1(24.257,4.699) 24.916,4.04 24.916,2.262 H2.11@25.146,2.032
  Bottom Layer w0.3: v1(18.923,6.604) 20.828,4.699 v1(24.257,4.699)
PA11: H2.10
PA12: H2.9
PA15: H2.8 U1.38 | length 12.3
  Top Layer w0.3: U1.38 24.342,7.782 24.342,7.773 29.21,2.905 30.64,2.905 31.566,1.979 32.713,1.979 H2.8@32.766,2.032
PB0: H1.14 U1.18 | length 37.6
  Top Layer w0.3: v1(12.319,16.891) 14.478,16.891 v1(16.002,15.367) ; v1(16.637,26.67) 17.78,26.67 H1.14 ; U1.18 19.812,15.848 v1(19.812,12.954)
  Bottom Layer w0.3: v1(12.319,16.891) 8.62,16.891 6.943,18.568 6.943,24.325 8.747,26.129 8.747,26.4 9.287,26.94 9.287,26.957 9.873,27.543 15.781,27.543 16.637,26.687 v1(16.637,26.67) ; v1(16.002,15.367) 17.307,14.062 17.831,14.062 18.939,12.954 v1(19.812,12.954)
PB1: H1.15 U1.19 | length 11.8
  Top Layer w0.3: H1.15 15.367,24.289 15.894,23.762 15.894,20.666 18.512,18.048 18.512,16.44 U1.19
PB3: H2.7 U1.39 | length 19.3
  Top Layer w0.3: U1.39 24.83,8.001 v1(24.892,8.001) ; v1(30.607,6.138) 31.442,6.138 31.766,5.814 31.766,5.623 31.912,5.477 35.72,5.477 36,5.757 v1(36.888,5.757)
  Bottom Layer w0.3: v1(24.892,8.001) 26.797,6.096 30.565,6.096 v1(30.607,6.138) ; H2.7@35.306,2.032 35.306,4.106 36.888,5.688 v1(36.888,5.757)
PB4: H2.6 U1.40 | length 24.2
  Top Layer w0.3: v1(22.579,10.314) 22.636,10.257 23.282,10.257 U1.40 ; v1(23.495,7.239) 26.416,4.318 v1(26.416,2.413)
  Bottom Layer w0.3: v1(22.579,10.314) 22.579,8.155 v1(23.495,7.239) ; v1(26.416,2.413) 26.473,2.356 26.473,1.703 27.272,0.905 35.72,0.905 36.306,1.491 36.306,1.508 36.822,2.024 H2.6@37.838,2.024
PB5: H2.5 U1.41 | length 20.1
  Top Layer w0.3: U1.41@24.499,9.746 25.508,8.737 25.508,7.2 28.031,4.677 38.021,4.677 40.156,2.542 40.156,2.262 H2.5@40.386,2.032
PB6: H2.4 U1.42 | length 22.7
  Top Layer w0.3: U1.42 25.908,9.044 25.908,7.366 28.197,5.077 40.161,5.077 42.696,2.542 42.696,2.262 H2.4@42.926,2.032
PB7: H2.3 U1.43 | length 25.8
  Top Layer w0.3: U1.43 26.308,9.352 26.308,7.532 26.944,6.895 28.305,6.895 28.765,6.435 30.126,6.435 31.168,7.477 39.569,7.477 45.014,2.032 H2.3@45.466,2.032
PB8: H1.2 U1.45 | length 44.9
  Top Layer w0.3: U1.45 27.168,9.906 v1(28.194,9.906) ; v1(33.401,10.16) 35.111,11.87 45.623,11.87 49.657,15.904 v1(49.657,17.145) ; H1.2 48.387,26.823 49.25,27.686 v1(52.705,27.686)
  Bottom Layer w0.3: v1(28.194,9.906) 30.67,9.906 30.924,10.16 v1(33.401,10.16) ; v1(49.657,17.145) 49.657,17.907 52.705,20.955 v1(52.705,27.686)
PB9: H1.3 U1.46 | length 34.3
  Top Layer w0.3: U1.46 26.793,10.988 27.199,10.988 v1(27.257,10.931) ; v1(32.512,10.795) 32.54,10.795 35.786,14.04 v1(35.814,14.04) ; v1(35.814,17.145) 36.407,17.738 36.407,18.008 36.523,18.124 36.523,25.965 37.168,26.61 37.168,26.898 37.829,27.559 45.111,27.559 45.847,26.823 H1.3
  Bottom Layer w0.3: v1(27.257,10.931) 27.392,10.795 v1(32.512,10.795) ; v1(35.814,14.04) v1(35.814,17.145)
PB10: H1.16 U1.21 | length 13.3
  Top Layer w0.3: H1.16 12.827,26.263 15.494,23.596 15.494,18.044 U1.21
PB11: H1.17 U1.22 | length 15.1
  Top Layer w0.3: H1.17 10.287,26.263 11.826,24.724 13.423,24.724 15.094,23.053 15.094,17.737 17.495,15.336
PB12: H2.17 R5.1 U1.25 | length 25
  Top Layer w0.3: H2.17@9.906,2.032 9.981,2.032 13.569,5.62 13.569,11.68 15.393,13.504 15.849,13.504 16.933,12.42 16.933,12.115 16.735,12.115 16.634,12.217 16.343,12.217 v1(16.285,12.274)
  Bottom Layer w0.3: R5.1 11.728,13.989 13.443,12.274 v1(16.285,12.274)
PB13: H2.16 U1.26 | length 16.1
  Top Layer w0.3: H2.16@12.446,2.032 12.676,2.262 12.676,4.161 14.292,5.778 14.292,11.625 v1(15.621,12.954) ; U1.26 17.848,12.324 17.848,12.895 v1(18.034,13.081)
  Bottom Layer w0.3: v1(15.621,12.954) 17.907,12.954 v1(18.034,13.081)
PB14: H2.15 U1.27 | length 10.8
  Top Layer w0.3: H2.15 15.216,2.135 15.216,8.984 U1.27
PB15: H2.14 U1.28 | length 9.6
  Top Layer w0.3: H2.14 17.569,1.948 17.569,10.63 U1.28
PC13: H1.4 U1.2 | length 26.9
  Top Layer w0.3: v1(26.15,14.183) 26.15,14.212 U1.2@26.416,14.478 ; v1(35.179,15.875) 35.26,15.875 35.683,15.452 38.751,15.452 39.878,16.579 39.878,20.193 43.307,23.622 H1.4
  Bottom Layer w0.3: v1(26.15,14.183) 33.487,14.183 v1(35.179,15.875)
SWCLK: H3.3 U1.37 | length 40.9
  Top Layer w0.3: H3.3 1.286,9.541 1.286,1.491 1.872,0.905 20.48,0.905 21.066,1.491 21.066,4.36 20.913,4.513 20.913,7.382 21.432,7.901 22.477,7.901 U1.37
SWDIO: H3.2 U1.34 | length 19
  Top Layer w0.3: v1(19.675,8.63) 19.733,8.687 19.869,8.687 U1.34
  Bottom Layer w0.3: H3.2 4.471,14.986 10.948,8.509 15.211,8.509 15.332,8.63 v1(19.675,8.63)
XTALA: C5.1 C10.2 R2.1 U1.5 | length 45.5
  Top Layer w0.3: v1(7.493,18.796) 6.696,17.999 6.696,11.44 8.912,9.224 11.569,9.224 12.319,8.474 C5.1@12.319,6.724 ; U1.5@25.595,15.828 26.459,16.691 26.459,17.241 v1(26.516,17.299)
  Bottom Layer w0.3: v1(7.493,18.796) 13.331,24.634 16.465,24.634 16.995,24.104 17.732,24.104 17.772,24.064 C10.2 18.892,23.714 18.966,23.714 19.135,23.545 19.135,18.695 20.591,17.239 22.43,17.239 22.505,17.314 26.501,17.314 v1(26.516,17.299)
XTALB: C5.2 C11.2 R2.2 U1.6 | length 39.1
  Top Layer w0.3: v1(13.701,19.99) 13.169,19.99 12.319,20.84 12.319,21.724 12.834,21.209 v1(14.351,21.209) ; v1(16.444,20.894) 16.444,23.556 19.447,26.559 19.447,26.957 20.033,27.543 23.511,27.543 24.527,26.527 24.527,24.733 26.793,22.467 26.793,21.721 v1(26.797,21.717) ; U1.6 25.852,16.791 25.852,17.412 26.916,18.477 27.129,18.477 v1(27.186,18.534)
  Bottom Layer w0.3: v1(13.701,19.99) 13.701,22.091 15.324,23.714 15.398,23.714 C11.2 15.918,23.894 16.405,23.894 16.895,23.404 R2.2@16.995,23.404 ; v1(14.351,21.209) 16.129,21.209 v1(16.444,20.894) ; v1(26.797,21.717) 27.178,21.336 27.178,18.542 v1(27.186,18.534)
XTALC: C12.1 U1.3 | length 8.6
  Top Layer w0.3: C12.1 23.844,21.279 24.581,20.542 24.581,19.996 v1(24.638,19.939) ; U1.3 26.679,15.497 26.679,16.346 27.178,16.845 v1(27.178,17.653)
  Bottom Layer w0.3: v1(24.638,19.939) 24.892,19.939 v1(27.178,17.653)
XTALD: C12.2 U1.4 | length 16.1
  Top Layer w0.3: C12.2@24.155,23.368 25.114,22.409 25.343,22.409 v1(25.4,22.352) ; U1.4 25.277,14.802 25.277,14.278 25.922,13.633 26.794,13.633 28.067,14.906 v1(28.067,18.796)
  Bottom Layer w0.3: v1(25.4,22.352) 26.94,22.352 28.067,21.225 v1(28.067,18.796)
pads on no net: M1.5 M1.6 M1.7 M1.8 M1.9 P1.3 P1.4

## Polygon pours and split planes (outlines as drawn)
GND on Top Layer "GND_L01_P000" (none, remove dead copper, pour order 0): -1.651,30.226 -1.27,29.845 55.626,29.845 55.626,-2.413 55.753,-2.54 55.499,-2.794 -1.651,-2.794
GND on Bottom Layer "GND_L02_P001" (none, remove dead copper, pour order 1): -2.54,30.607 56.261,30.607 56.134,30.48 56.134,-3.556 -1.143,-3.556 -2.54,-2.159

## Silkscreen, mask and mechanical layers (free items; w line width, h text height)
Top Overlay:
  text "PB11" at 10.103,24.949 h0.25 r270
  text "PB10" at 12.643,24.949 h0.25 r270
  text "PB1" at 15.183,24.949 h0.25 r270
  text "PB0" at 17.723,24.949 h0.25 r270
  text "PA5" at 25.343,24.949 h0.25 r270
  text "PA4" at 27.883,24.949 h0.25 r270
  text "PA3" at 30.423,24.949 h0.25 r270
  text "PA2" at 33.09,24.949 h0.25 r270
  text "PA1" at 35.503,24.949 h0.25 r270
  text "PA0" at 38.043,24.949 h0.25 r270
  text "NRST" at 40.583,24.949 h0.25 r270
  text "PC13" at 43.25,24.949 h0.25 r270
  text "PB9" at 45.663,24.949 h0.25 r270
  text "PB8" at 48.203,24.949 h0.25 r270
  text "GND" at 2.483,24.822 h0.25 r270
  text "GND" at 5.023,24.822 h0.25 r270
  text "3V3" at 7.563,24.822 h0.25 r270
  text "GND" at 50.743,24.822 h0.25 r270
  text "PA7" at 20.136,24.708 h0.25
  text "PA6" at 22.676,24.708 h0.25
  text "PB12" at 9.849,4.502 h0.29 r270
  text "PB13" at 12.262,4.502 h0.29 r270
  text "PB14" at 14.929,4.502 h0.29 r270
  text "PB15" at 17.342,4.502 h0.29 r270